# EAGLE board mega_shield_0_3.job (EAGLE 6.5.0)
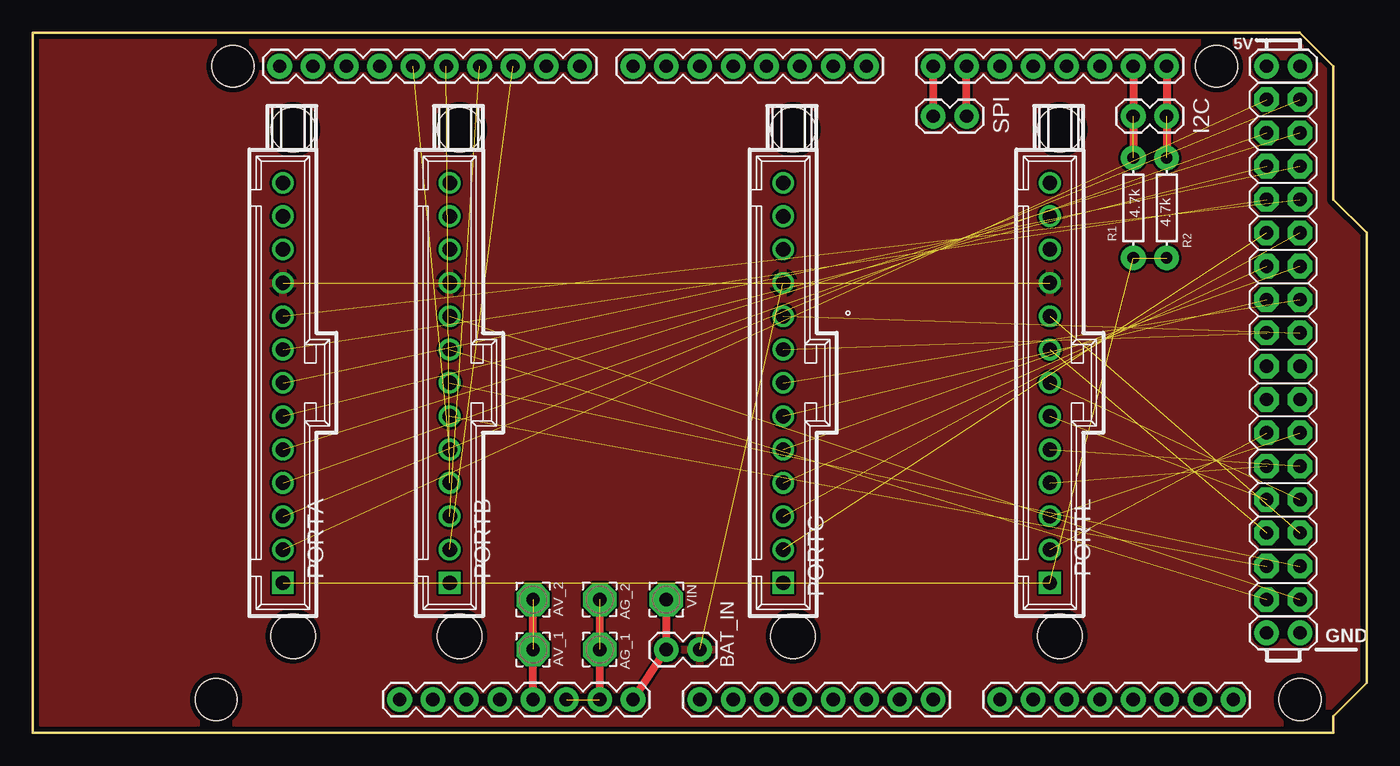
[diagram p0: board, top side]
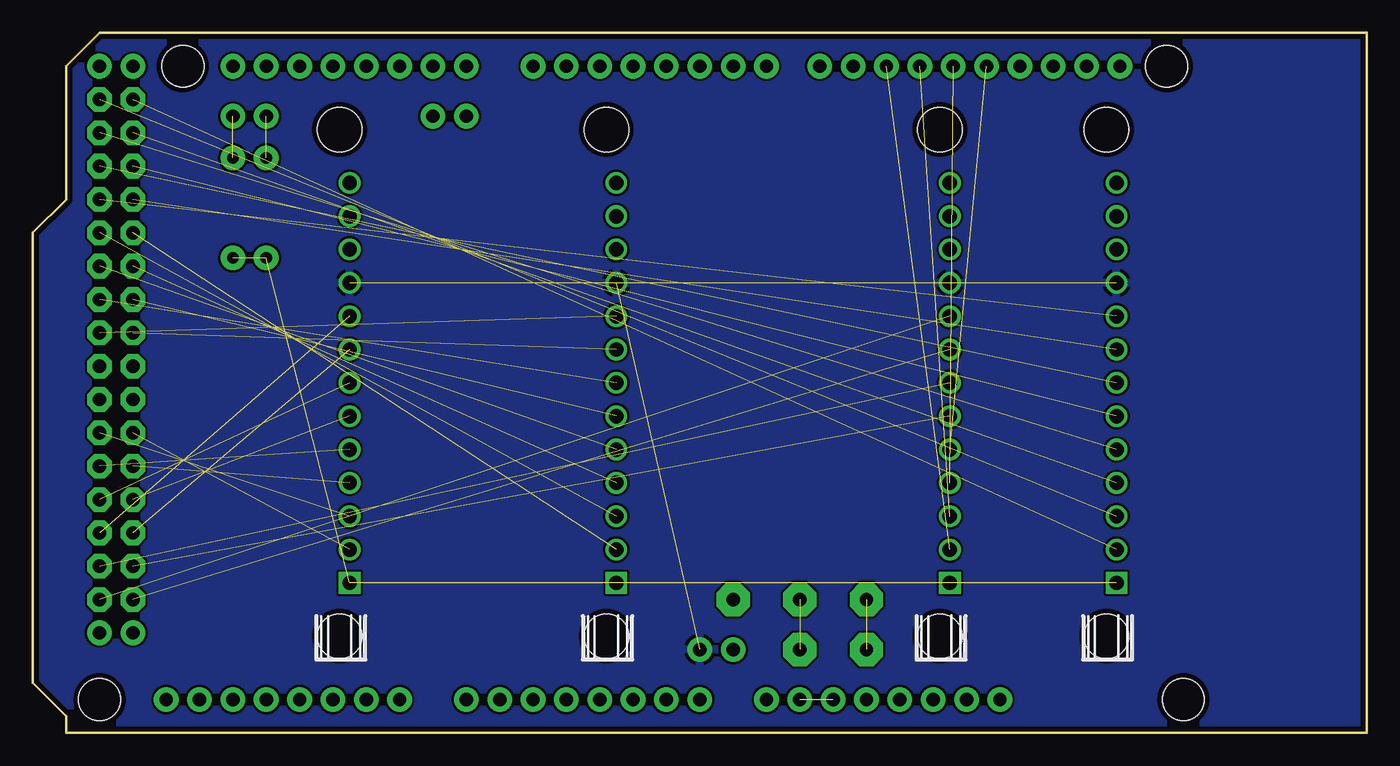
[diagram p1: board, bottom side, seen from below]

Size 101.6 x 53.34 mm. Coordinates in mm from the lower left corner, seen from the top.
Outline: 0,0 99.06,0 99.06,1.27 101.6,3.81 101.6,38.1 99.06,40.64 99.06,50.8 96.52,53.34 0,53.34 0,0
Copper layers (1*16): Top 0.0356mm / dielectric 1.5011mm / Bottom 0.0356mm
Design rules "oshPark": minimum track width 6mil, minimum drill 13mil, track to track 6mil, track to pad 6mil, pad to pad 6mil, via to via 6mil, smd to smd 6mil, copper to edge 15mil, drill to drill 6mil, minimum pad ring 7mil, minimum via ring 7mil, stop-mask expansion 3mil, vias tented up to drill 0mil, thermal gap 10mil
Net classes: 0 default: width 0.229 mm, drill 0.254 mm, clearance 0.178 mm; 1 VCC: width 0.457 mm, drill 0.381 mm, clearance 0.356 mm

## Footprints (pad centres in the part's own frame; a part is rotated, then mirrored left to right if it is on the bottom)
2,54/1,0 = drill 1.016 pad 2.54 octagon: 1 0,0
1X02 = drill 1.016 pad 1.88: 1 0,0; 2 2.54,0
ARDUINO_MEGA = drill 1.016 pad 1.88: 0 63.5,50.8; 1 60.96,50.8; 2 58.42,50.8; 3 55.88,50.8; 3.3V 35.56,2.54; 4 53.34,50.8; 5 50.8,50.8; 5V 38.1,2.54; 5V. 93.98,50.8; 5V.. 96.52,50.8; 6 48.26,50.8; 7 45.72,50.8; 8 41.656,50.8; 9 39.116,50.8; 10 36.576,50.8; 11 34.036,50.8; 12 31.496,50.8; 13 28.956,50.8; 14 68.58,50.8; 15 71.12,50.8; 16 73.66,50.8; 17 76.2,50.8; 18 78.74,50.8; 19 81.28,50.8; 20 83.82,50.8; 21 86.36,50.8; A0 50.8,2.54; A1 53.34,2.54; A2 55.88,2.54; A3 58.42,2.54; A4 60.96,2.54; A5 63.5,2.54; A6 66.04,2.54; A7 68.58,2.54; A8 73.66,2.54; A9 76.2,2.54; A10 78.74,2.54; A11 81.28,2.54; A12 83.82,2.54; A13 86.36,2.54; A14 88.9,2.54; A15 91.44,2.54; AREF 23.876,50.8; GND 26.416,50.8; GND. 43.18,2.54; GND.. 40.64,2.54; GND... 93.98,7.62; GND.... 96.52,7.62; I/OREF 30.48,2.54; N/C 27.94,2.54; RESET 33.02,2.54; SCL1 18.796,50.8; SDA1 21.336,50.8; VIN 45.72,2.54 | drill 1.016 pad 1.88 octagon: 22 93.98,48.26; 23 96.52,48.26; 24 93.98,45.72; 25 96.52,45.72; 26 93.98,43.18; 27 96.52,43.18; 28 93.98,40.64; 29 96.52,40.64; 30 93.98,38.1; 31 96.52,38.1; 32 93.98,35.56; 33 96.52,35.56; 34 93.98,33.02; 35 96.52,33.02; 36 93.98,30.48; 37 96.52,30.48; 38 93.98,27.94; 39 96.52,27.94; 40 93.98,25.4; 41 96.52,25.4; 42 93.98,22.86; 43 96.52,22.86; 44 93.98,20.32; 45 96.52,20.32; 46 93.98,17.78; 47 96.52,17.78; 48 93.98,15.24; 49 96.52,15.24; 50 93.98,12.7; 51 96.52,12.7; 52 93.98,10.16; 53 96.52,10.16 | hole 3.2: 15.24,50.8; 13.97,2.54; 90.17,50.8; 96.52,2.54
70545-POS13 = drill 1.1 square: P$1 15.24,0 | drill 1.1: P$2 12.7,0; P$3 10.16,0; P$4 7.62,0; P$5 5.08,0; P$6 2.54,0; P$7 0,0; P$8 -2.54,0; P$9 -5.08,0; P$10 -7.62,0; P$11 -10.16,0; P$12 -12.7,0; P$13 -15.24,0 | hole 3.404: -19.304,0.762; 19.304,0.762
AXIAL-0.3 = drill 0.9 pad 1.88: P$1 -3.81,0; P$2 3.81,0

## Placement (x,y rotation side)
AG_1  [2,54/1,0]  43.18,6.35 180 top
AG_2  [2,54/1,0]  43.18,10.16 180 top
AV_1  [2,54/1,0]  38.1,6.35 0 top
AV_2  [2,54/1,0]  38.1,10.16 0 top
BAT_IN  [1X02]  48.26,6.35 0 top
I2C  [1X02]  83.82,46.99 0 top
PCB1  ARDUINO_MEGA  [ARDUINO_MEGA]  0,0 0 top
PORTA  HEADER_POS10_70545  [70545-POS13]  19.05,26.67 270 top
PORTB  HEADER_POS10_70545  [70545-POS13]  31.75,26.67 270 top
PORTC  HEADER_POS10_70545  [70545-POS13]  57.15,26.67 270 top
PORTL  HEADER_POS10_70545  [70545-POS13]  77.47,26.67 270 top
R1  4.7k  [AXIAL-0.3]  83.82,40.01 90 top
R2  4.7k  [AXIAL-0.3]  86.36,40.01 270 top
SPI  [1X02]  68.58,46.99 0 top
VIN  [2,54/1,0]  48.26,10.16 0 top

## Library data of the parts
AG_1 AG_2 AV_1 AV_2 VIN = wirepad
BAT_IN I2C R1 R2 SPI = SparkFun
PCB1 = Nathans_Arduinos
PORTA PORTB PORTC PORTL = con-molex-c-grid-sl

## Nets
B2: PCB1.10 PORTB.P$2
B3: PCB1.11 PORTB.P$3
B4: PCB1.12 PORTB.P$4
B5: PCB1.13 PORTB.P$5
B6: PCB1.50 PORTB.P$6
B7: PCB1.51 PORTB.P$7
B8: PCB1.52 PORTB.P$8
B9: PCB1.53 PORTB.P$9
GND: BAT_IN.2 PORTA.P$10 PORTB.P$10 PORTC.P$10 PORTL.P$10
GND_PI: AG_1.1 AG_2.1 PCB1.GND. PCB1.GND..
N$1: PCB1.22 PORTA.P$2
N$2: PCB1.23 PORTA.P$3
N$3: PCB1.24 PORTA.P$4
N$4: PCB1.25 PORTA.P$5
N$5: PCB1.26 PORTA.P$6
N$6: PCB1.27 PORTA.P$7
N$7: PCB1.28 PORTA.P$8
N$8: PCB1.29 PORTA.P$9
N$9: PCB1.14 SPI.1
N$10: PCB1.15 SPI.2
N$11: PCB1.30 PORTC.P$2
N$12: PCB1.31 PORTC.P$3
N$13: PCB1.32 PORTC.P$4
N$14: PCB1.33 PORTC.P$5
N$15: PCB1.34 PORTC.P$6
N$16: PCB1.35 PORTC.P$7
N$17: PCB1.36 PORTC.P$8
N$18: PCB1.37 PORTC.P$9
N$19: PCB1.42 PORTL.P$2
N$20: PCB1.43 PORTL.P$3
N$21: PCB1.44 PORTL.P$4
N$22: PCB1.45 PORTL.P$5
N$23: PCB1.46 PORTL.P$6
N$24: PCB1.47 PORTL.P$7
N$25: PCB1.49 PORTL.P$9
N$29: PCB1.48 PORTL.P$8
N$35: I2C.1 PCB1.20 R1.P$2
N$36: I2C.2 PCB1.21 R2.P$1
PI_VCC: AV_1.1 AV_2.1 PCB1.5V
VCC: PORTA.P$1 PORTB.P$1 PORTC.P$1 PORTL.P$1 R1.P$1 R2.P$2
VIN: BAT_IN.1 PCB1.VIN VIN.1

## Tracks (layer width: path | path; a pad name or v marks a point on that pad's centre or on a via)
B2  (1 unrouted)
B3  (1 unrouted)
B4  (1 unrouted)
B5  (1 unrouted)
B6  (1 unrouted)
B7  (1 unrouted)
B8  (1 unrouted)
B9  (1 unrouted)
GND  (4 unrouted)
  pour Bottom: 0,53.34 96.52,53.34 99.06,50.8 99.06,40.64 101.6,38.1 101.6,3.81 99.06,1.27 99.06,0 0,0
  pour Top: 0,53.34 96.52,53.34 99.06,50.8 99.06,40.64 101.6,38.1 101.6,3.81 99.06,1.27 99.06,0 0,0
GND_PI  (2 unrouted)
  Top 0.61: AG_2.1 PCB1.GND.
N$1  (1 unrouted)
N$2  (1 unrouted)
N$3  (1 unrouted)
N$4  (1 unrouted)
N$5  (1 unrouted)
N$6  (1 unrouted)
N$7  (1 unrouted)
N$8  (1 unrouted)
N$9
  Top 0.61: SPI.1 PCB1.14
N$10
  Top 0.61: SPI.2 PCB1.15
N$11  (1 unrouted)
N$12  (1 unrouted)
N$13  (1 unrouted)
N$14  (1 unrouted)
N$15  (1 unrouted)
N$16  (1 unrouted)
N$17  (1 unrouted)
N$18  (1 unrouted)
N$19  (1 unrouted)
N$20  (1 unrouted)
N$21  (1 unrouted)
N$22  (1 unrouted)
N$23  (1 unrouted)
N$24  (1 unrouted)
N$25  (1 unrouted)
N$29  (1 unrouted)
N$35  (1 unrouted)
  Top 0.61: PCB1.20 R1.P$2
N$36  (1 unrouted)
  Top 0.61: PCB1.21 R2.P$1
PI_VCC  (1 unrouted)
  Top 0.61: PCB1.5V AV_2.1
VCC  (5 unrouted)
VIN
  Top 0.61: PCB1.VIN BAT_IN.1 VIN.1